# EAGLE board espcam brd (EAGLE 7.5.0)
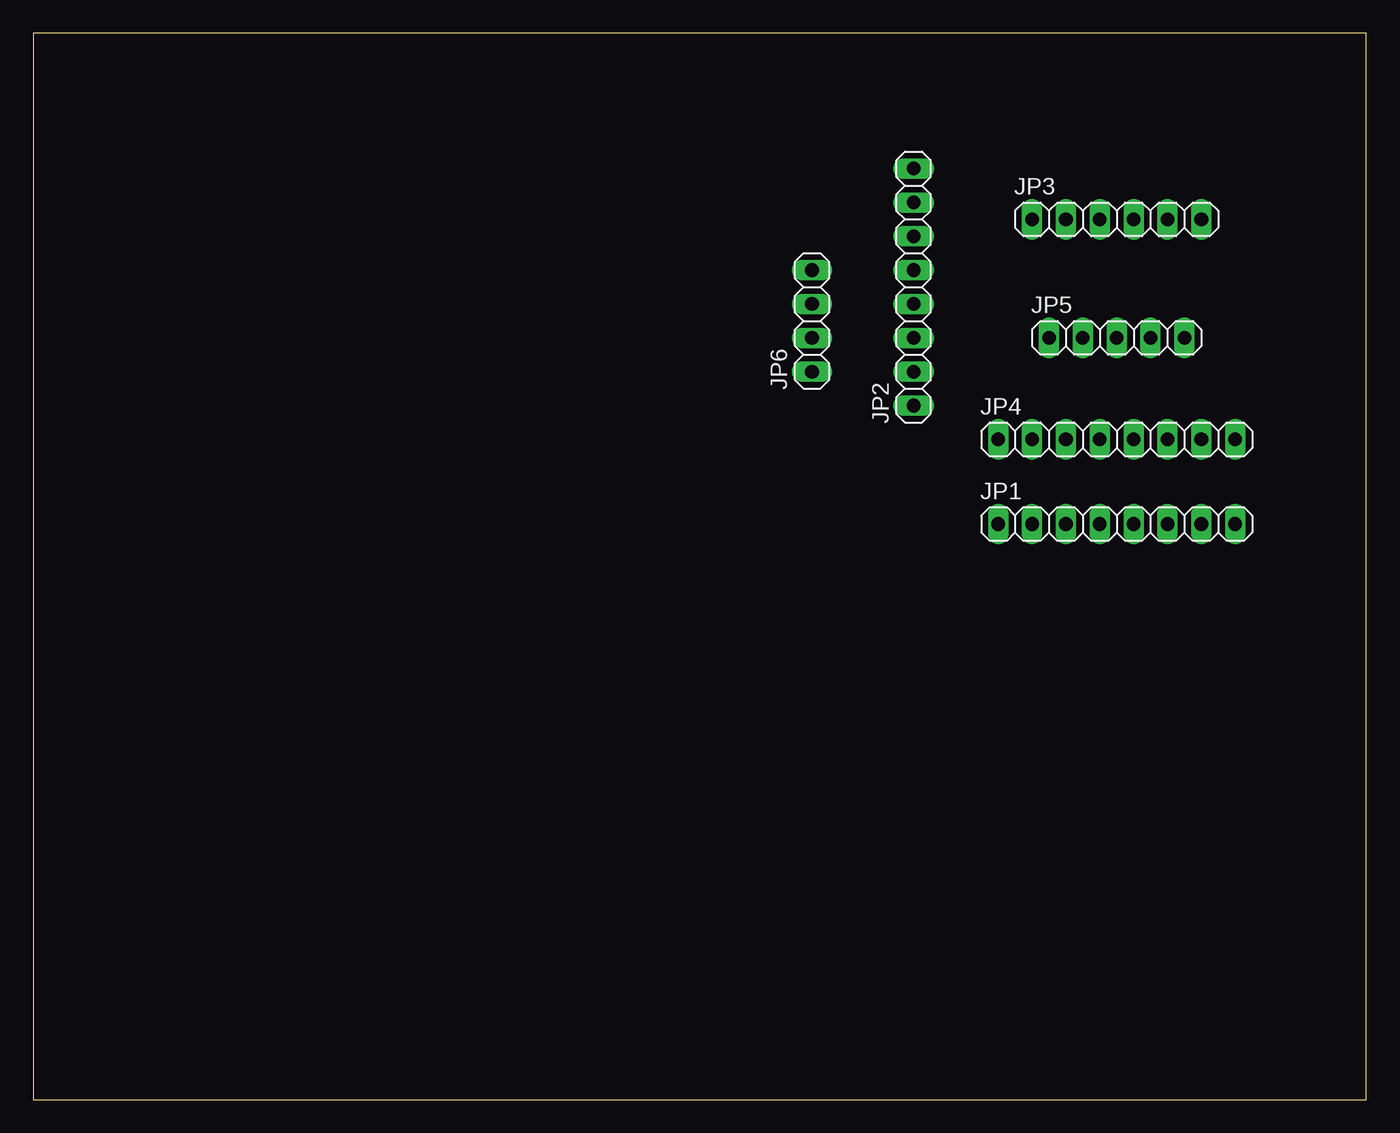
[diagram p0: board, top side]
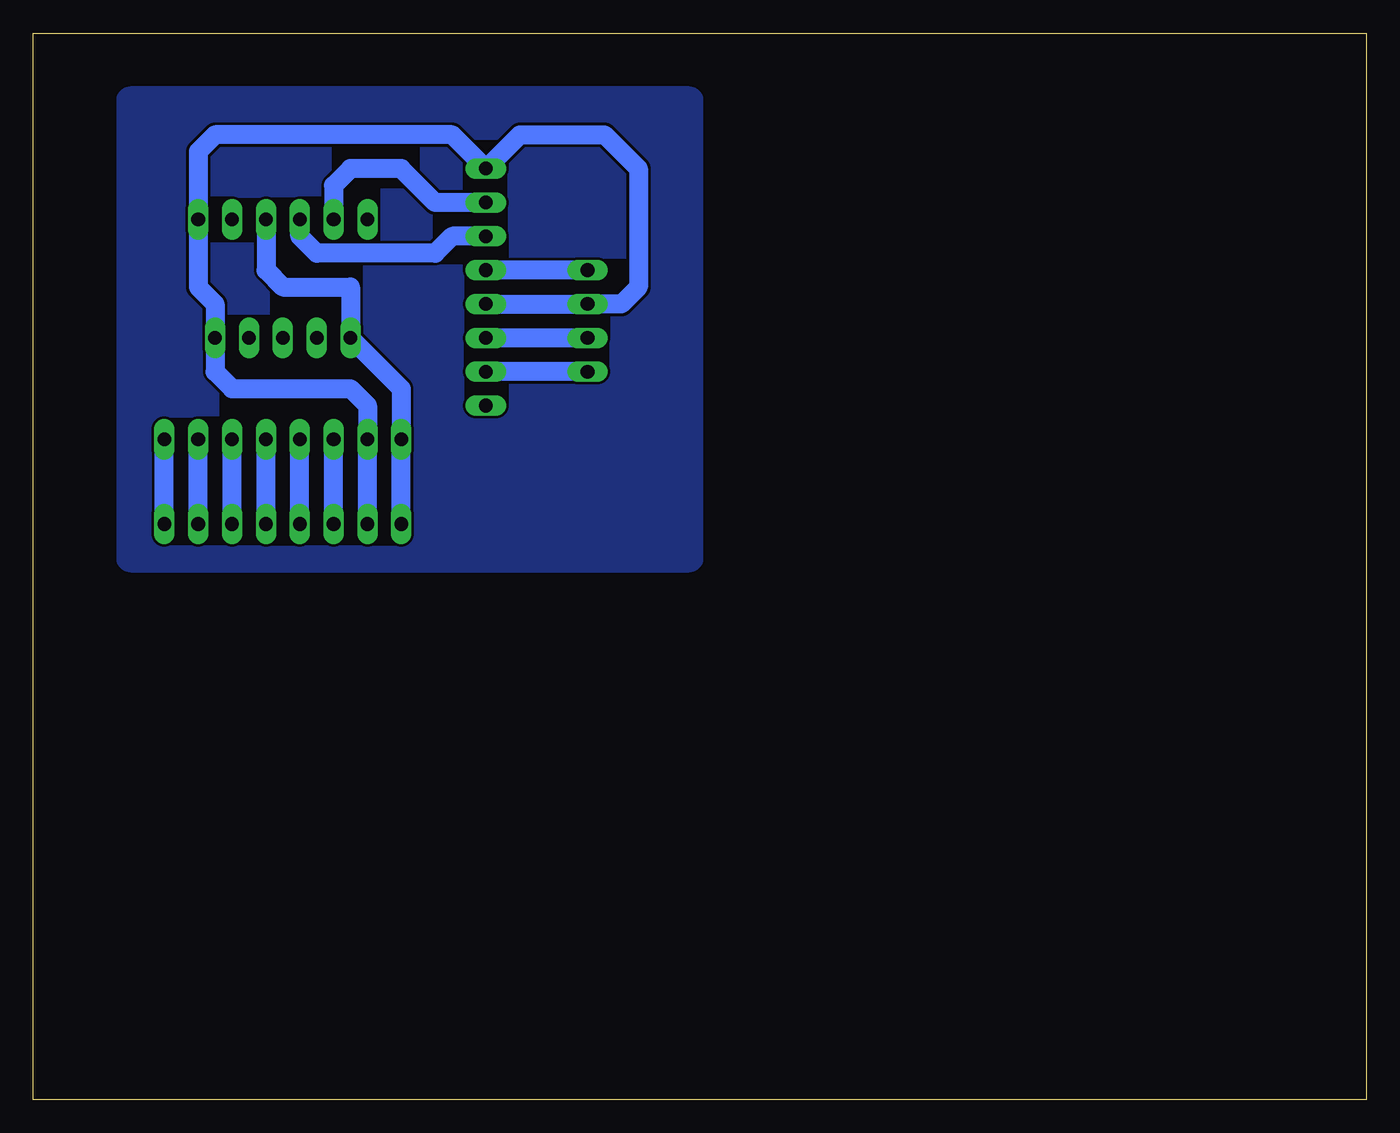
[diagram p1: board, bottom side, seen from below]

Size 100 x 80 mm. Coordinates in mm from the lower left corner, seen from the top.
Outline: 0,0 100,0 100,80 0,80 0,0
Copper layers (1*16): Top 0.035mm / dielectric 1.5mm / Bottom 0.035mm
Design rules "default": minimum track width 10mil, minimum drill 24mil, track to track 8mil, track to pad 8mil, pad to pad 8mil, via to via 8mil, smd to smd 8mil, copper to edge 40mil, drill to drill 8mil, minimum pad ring 10mil, minimum via ring 8mil, stop-mask expansion 4mil, vias tented up to drill 0mil, thermal gap 10mil

## Footprints (pad centres in the part's own frame; a part is rotated, then mirrored left to right if it is on the bottom)
1X08 = drill 1.016 long: 1 -8.89,0; 2 -6.35,0; 3 -3.81,0; 4 -1.27,0; 5 1.27,0; 6 3.81,0; 7 6.35,0; 8 8.89,0
1X06 = drill 1.016 long: 1 -6.35,0; 2 -3.81,0; 3 -1.27,0; 4 1.27,0; 5 3.81,0; 6 6.35,0
1X05 = drill 1.016 long: 1 -5.08,0; 2 -2.54,0; 3 0,0; 4 2.54,0; 5 5.08,0
1X04 = drill 1.016 long: 1 -3.81,0; 2 -1.27,0; 3 1.27,0; 4 3.81,0

## Placement (x,y rotation side)
JP1  [1X08]  81.28,43.18 0 top
JP2  [1X08]  66.04,60.96 90 top
JP3  [1X06]  81.28,66.04 0 top
JP4  [1X08]  81.28,49.53 0 top
JP5  [1X05]  81.28,57.15 0 top
JP6  [1X04]  58.42,58.42 90 top

## Library data of the parts
JP1-JP6 = pinhead

## Nets
3V3: JP2.1
5V: JP1.1 JP3.4 JP4.1 JP5.1
GND: JP1.2 JP2.4 JP2.8 JP3.6 JP4.2 JP5.5 JP6.3
IO0: JP2.3 JP6.2
IO2: JP1.7 JP4.7
IO4: JP1.8 JP4.8
IO12: JP1.3 JP4.3
IO13: JP1.4 JP4.4
IO14: JP1.6 JP4.6
IO15: JP1.5 JP4.5
IO16: JP2.2 JP6.1
RX: JP2.7 JP3.2
TX: JP2.6 JP3.3
VOUT: JP2.5 JP6.4

## Tracks (layer width: path | path; a pad name or v marks a point on that pad's centre or on a via)
5V
  Bottom 1.422: JP3.4 82.55,62.23 81.28,60.96 76.2,60.96 JP5.1 72.39,53.34 JP4.1 JP1.1
GND
  Bottom 1.422: JP2.4 JP6.3 55.88,59.69 54.61,60.96 54.61,69.85 57.15,72.39 63.5,72.39 JP2.8 68.58,72.39 86.36,72.39 87.63,71.12 JP3.6 87.63,60.96 86.36,59.69 JP5.5 86.36,54.61 85.09,53.34 76.2,53.34 74.93,52.07 JP4.2 JP1.2
IO0
  Bottom 1.422: JP6.2 JP2.3
IO2
  Bottom 1.422: JP1.7 JP4.7
IO4
  Bottom 1.422: JP1.8 JP4.8
IO12
  Bottom 1.422: JP1.3 JP4.3
IO13
  Bottom 1.422: JP1.4 JP4.4
IO14
  Bottom 1.422: JP1.6 JP4.6
IO15
  Bottom 1.422: JP1.5 JP4.5
IO16
  Bottom 1.422: JP6.1 JP2.2
N$1
  pour Bottom: 50.8,74.93 92.71,74.93 92.71,40.64 50.8,40.64
RX
  Bottom 1.422: JP2.7 69.85,67.31 72.39,69.85 76.2,69.85 77.47,68.58 JP3.2
TX
  Bottom 1.422: JP2.6 68.58,64.77 69.85,63.5 78.74,63.5 80.01,64.77 JP3.3
VOUT
  Bottom 1.422: JP6.4 JP2.5